# EAGLE board Smart Alarm Clock (EAGLE 9.7.0)

Size 242.54 x 194.54 mm. Coordinates in mm from the lower left corner, seen from the top.
Outline: 0,0 242.54,0 242.54,194.54 0,194.54 0,0
Copper layers (1*16): Top 0.035mm / dielectric 1.5mm / Bottom 0.035mm
Design rules "default": minimum track width 6mil, minimum drill 0.35mm, track to track 6mil, track to pad 6mil, pad to pad 6mil, via to via 6mil, smd to smd 6mil, copper to edge 40mil, drill to drill 6mil, minimum pad ring 10mil, minimum via ring 8mil, stop-mask expansion 4mil, vias tented up to drill 0mil, thermal gap 10mil

## Footprints (pad centres in the part's own frame; a part is rotated, then mirrored left to right if it is on the bottom)
PIEZO = drill 1 pad 1.6: 1 -3.5,0; 2 3.5,0
RESAD1016W63L850D250B = drill 0.83 pad 1.43: 1 -5.08,0; 2 5.08,0
GL5528 = drill 0.8 pad 1.4: 1 -1.702,0; 2 1.702,0
HA-06-SM065 = drill 1 pad 1.676: 1 -2.54,-2.54; 2 0,2.54; 3 2.54,-2.54
TSOP48 = drill 0.8: 1 -2.54,0; 2 0,0; 3 2.54,0
JHD-162A = drill 1.016 long: 1 -19.05,0; 2 -16.51,0; 3 -13.97,0; 4 -11.43,0; 5 -8.89,0; 6 -6.35,0; 7 -3.81,0; 8 -1.27,0; 9 1.27,0; 10 3.81,0; 11 6.35,0; 12 8.89,0; 13 11.43,0; 14 13.97,0; 15 16.51,0; 16 19.05,0
ARDUINO-UNO-R3-SHIELD = drill 1.016 pad 1.88: 3.3V 24.13,-2.54; 5V 24.13,0; A0 24.13,12.7; A1 24.13,15.24; A2 24.13,17.78; A3 24.13,20.32; A4 24.13,22.86; A5 24.13,25.4; AREF -24.13,-13.97; D2 -24.13,20.32; D3 -24.13,17.78; D4 -24.13,15.24; D5 -24.13,12.7; D6 -24.13,10.16; D7 -24.13,7.62; D8 -24.13,3.81; D9 -24.13,1.27; D10 -24.13,-1.27; D11 -24.13,-3.81; D12 -24.13,-6.35; D13 -24.13,-8.89; GND@0 24.13,2.54; GND@1 24.13,5.08; GND@2 -24.13,-11.43; IOREF 24.13,-7.62; NC 24.13,-10.16; RES 24.13,-5.08; RX -24.13,25.4; SCL -24.13,-19.05; SDA -24.13,-16.51; TX -24.13,22.86; VIN 24.13,7.62

## Placement (x,y rotation side)
PIEZO1  PIEZO  [PIEZO]  156.43,59.36 180 top
R1  1k  [RESAD1016W63L850D250B]  162.78,69.52 90 top
R2  PHOTOCELL_GL5528  [GL5528]  116.5,153.63 0 top
R3  1k  [RESAD1016W63L850D250B]  172.94,69.52 90 top
R4  220  [RESAD1016W63L850D250B]  205.96,69.52 90 top
R5  1k  [RESAD1016W63L850D250B]  115.23,143.47 90 top
RPOT1  250k  [HA-06-SM065]  166.03,153.63 0 top
U3  IR-RECEIVERTSOP48  [TSOP48]  138.09,171.41 180 top
U5  LCD-16X2JHD-162A  [JHD-162A]  186.91,36.63 0 top
UMASTER  ARDUINO-UNO-R3-SHIELD  [ARDUINO-UNO-R3-SHIELD]  47.88,164.69 270 top
USLAVE  ARDUINO-UNO-R3-SHIELD  [ARDUINO-UNO-R3-SHIELD]  87.61,50.99 270 top

## Library data of the parts
PIEZO1 R1-R5 RPOT1 U3 U5 UMASTER USLAVE = Tinkercad

## Nets
PIEZO1_1: PIEZO1.1 R1.1
U5_LED-: R4.1 U5.16
U5_VO: R3.1 U5.3
UMASTER_5V: R2.2 RPOT1.1 U3.3 UMASTER.5V
UMASTER_A0: RPOT1.2 UMASTER.A0
UMASTER_A1: R2.1 R5.2 UMASTER.A1
UMASTER_A4: UMASTER.A4 USLAVE.A4
UMASTER_A5: UMASTER.A5 USLAVE.A5
UMASTER_D11: U3.1 UMASTER.D11
USLAVE_5V: U5.2 U5.15 USLAVE.5V
USLAVE_D2: U5.14 USLAVE.D2
USLAVE_D3: U5.13 USLAVE.D3
USLAVE_D4: U5.12 USLAVE.D4
USLAVE_D5: U5.11 USLAVE.D5
USLAVE_D6: U5.6 USLAVE.D6
USLAVE_D7: U5.4 USLAVE.D7
USLAVE_D12: PIEZO1.2 USLAVE.D12
USLAVE_GND: R1.2 R3.2 R4.2 R5.1 RPOT1.3 U3.2 U5.1 U5.5 UMASTER.GND@0 UMASTER.GND@1 UMASTER.GND@2 USLAVE.GND@0 USLAVE.GND@1 USLAVE.GND@2

## Tracks (layer width: path | path; a pad name or v marks a point on that pad's centre or on a via)
PIEZO1_1  (1 unrouted)
U5_LED-  (1 unrouted)
U5_VO  (1 unrouted)
UMASTER_5V  (3 unrouted)
UMASTER_A0  (1 unrouted)
UMASTER_A1  (2 unrouted)
UMASTER_A4  (1 unrouted)
UMASTER_A5  (1 unrouted)
UMASTER_D11  (1 unrouted)
USLAVE_5V  (2 unrouted)
USLAVE_D2  (1 unrouted)
USLAVE_D3  (1 unrouted)
USLAVE_D4  (1 unrouted)
USLAVE_D5  (1 unrouted)
USLAVE_D6  (1 unrouted)
USLAVE_D7  (1 unrouted)
USLAVE_D12  (1 unrouted)
USLAVE_GND  (13 unrouted)